# EAGLE board ISCTrainingProgramw2016_1 (EAGLE 7.5.0)
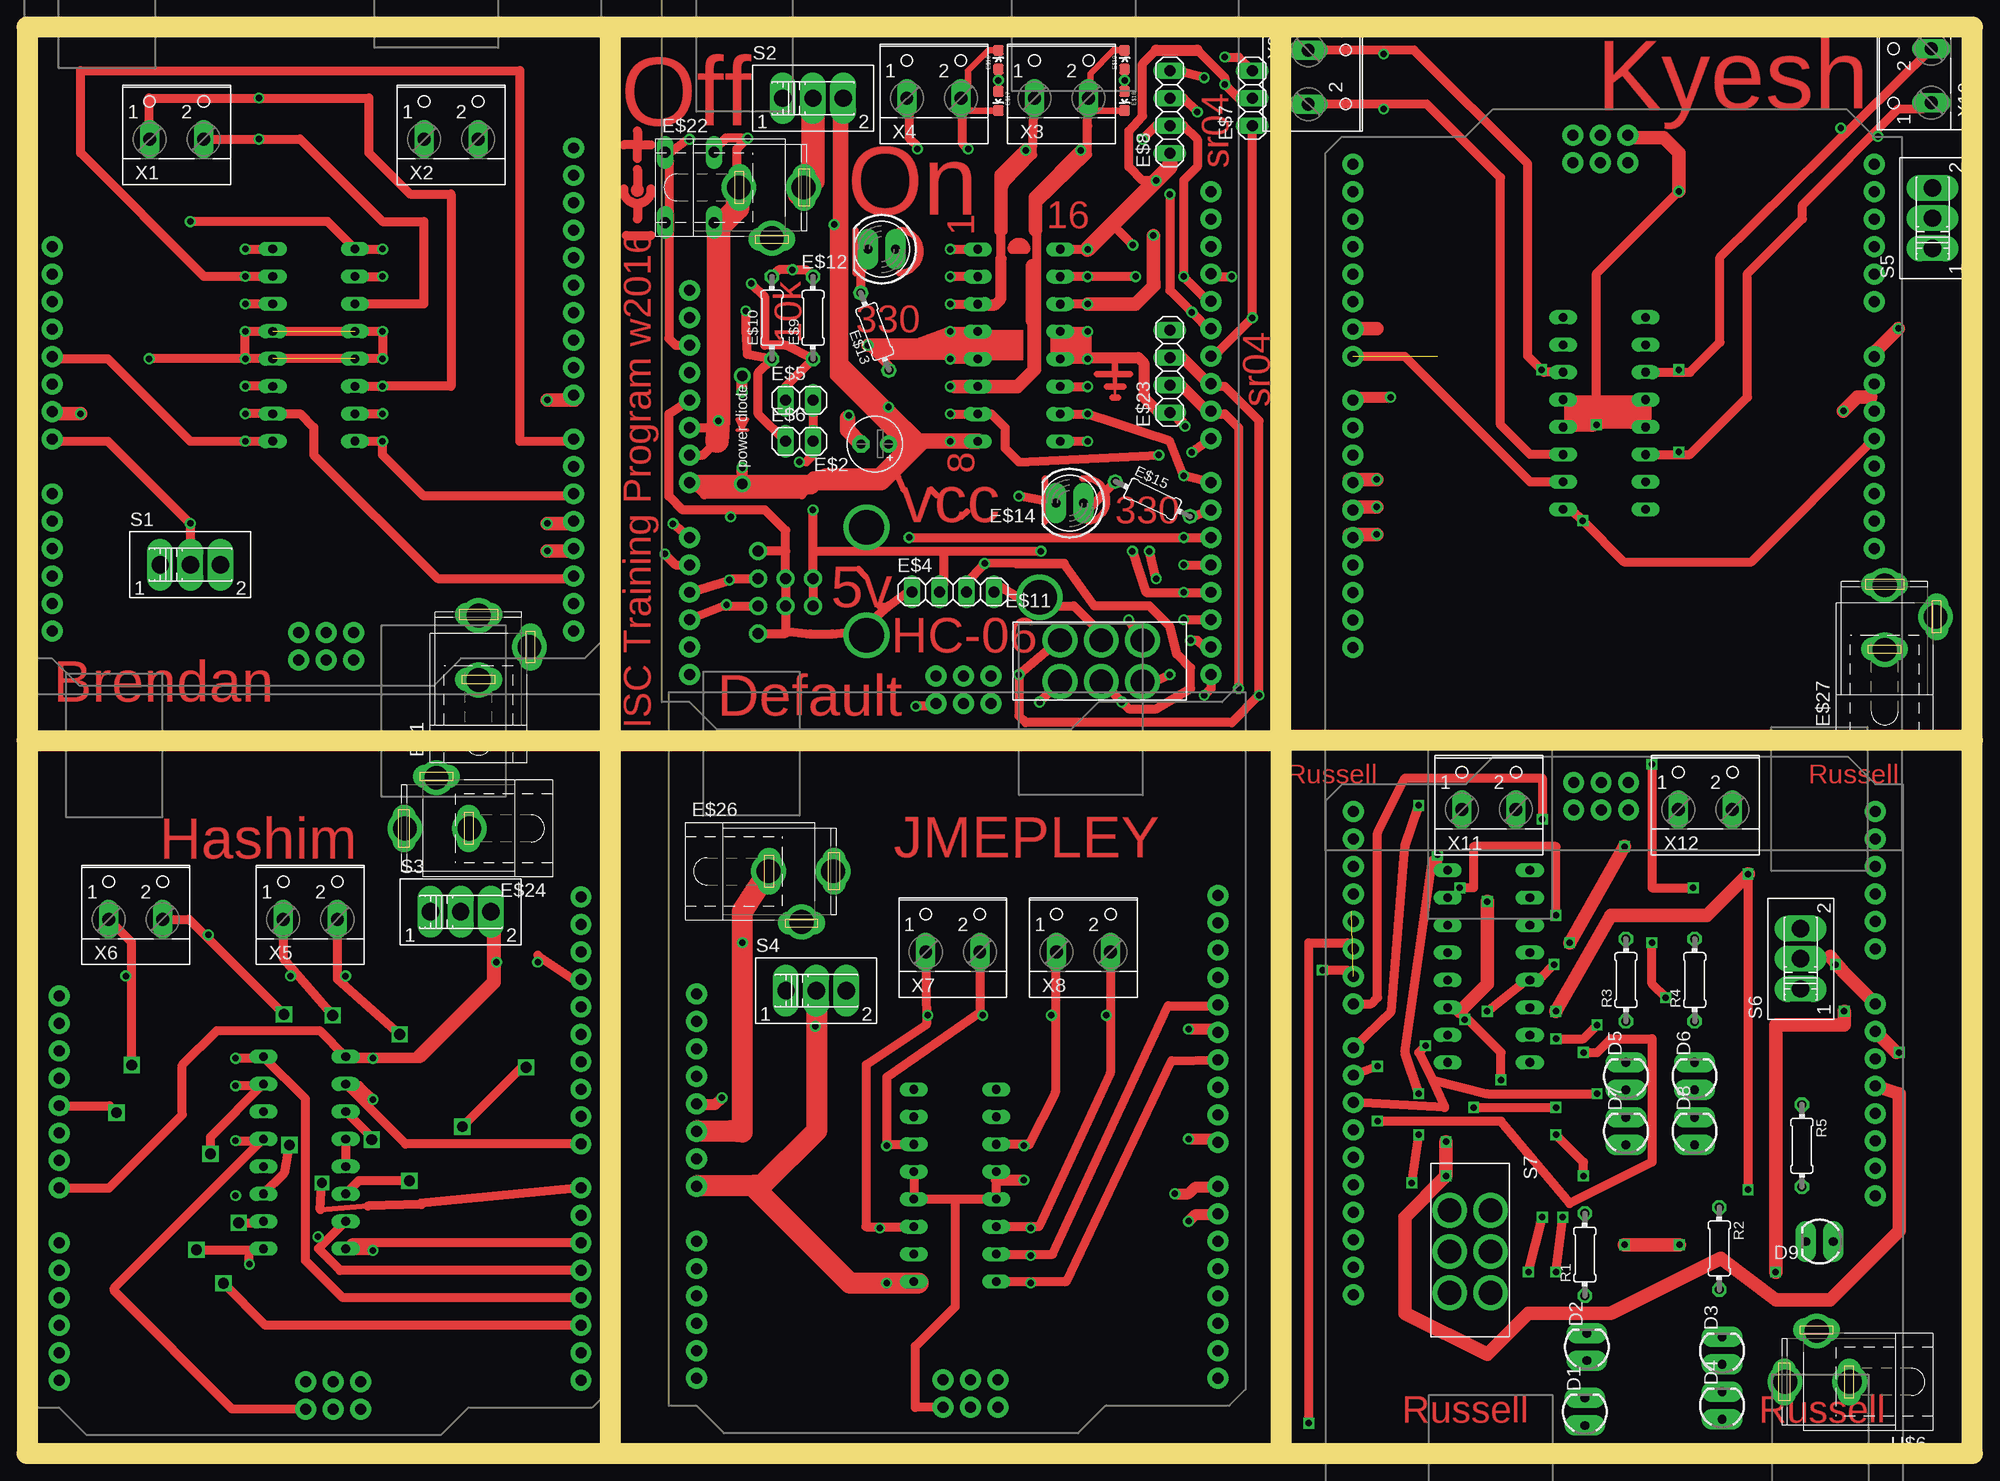
[diagram p0: board, top side]
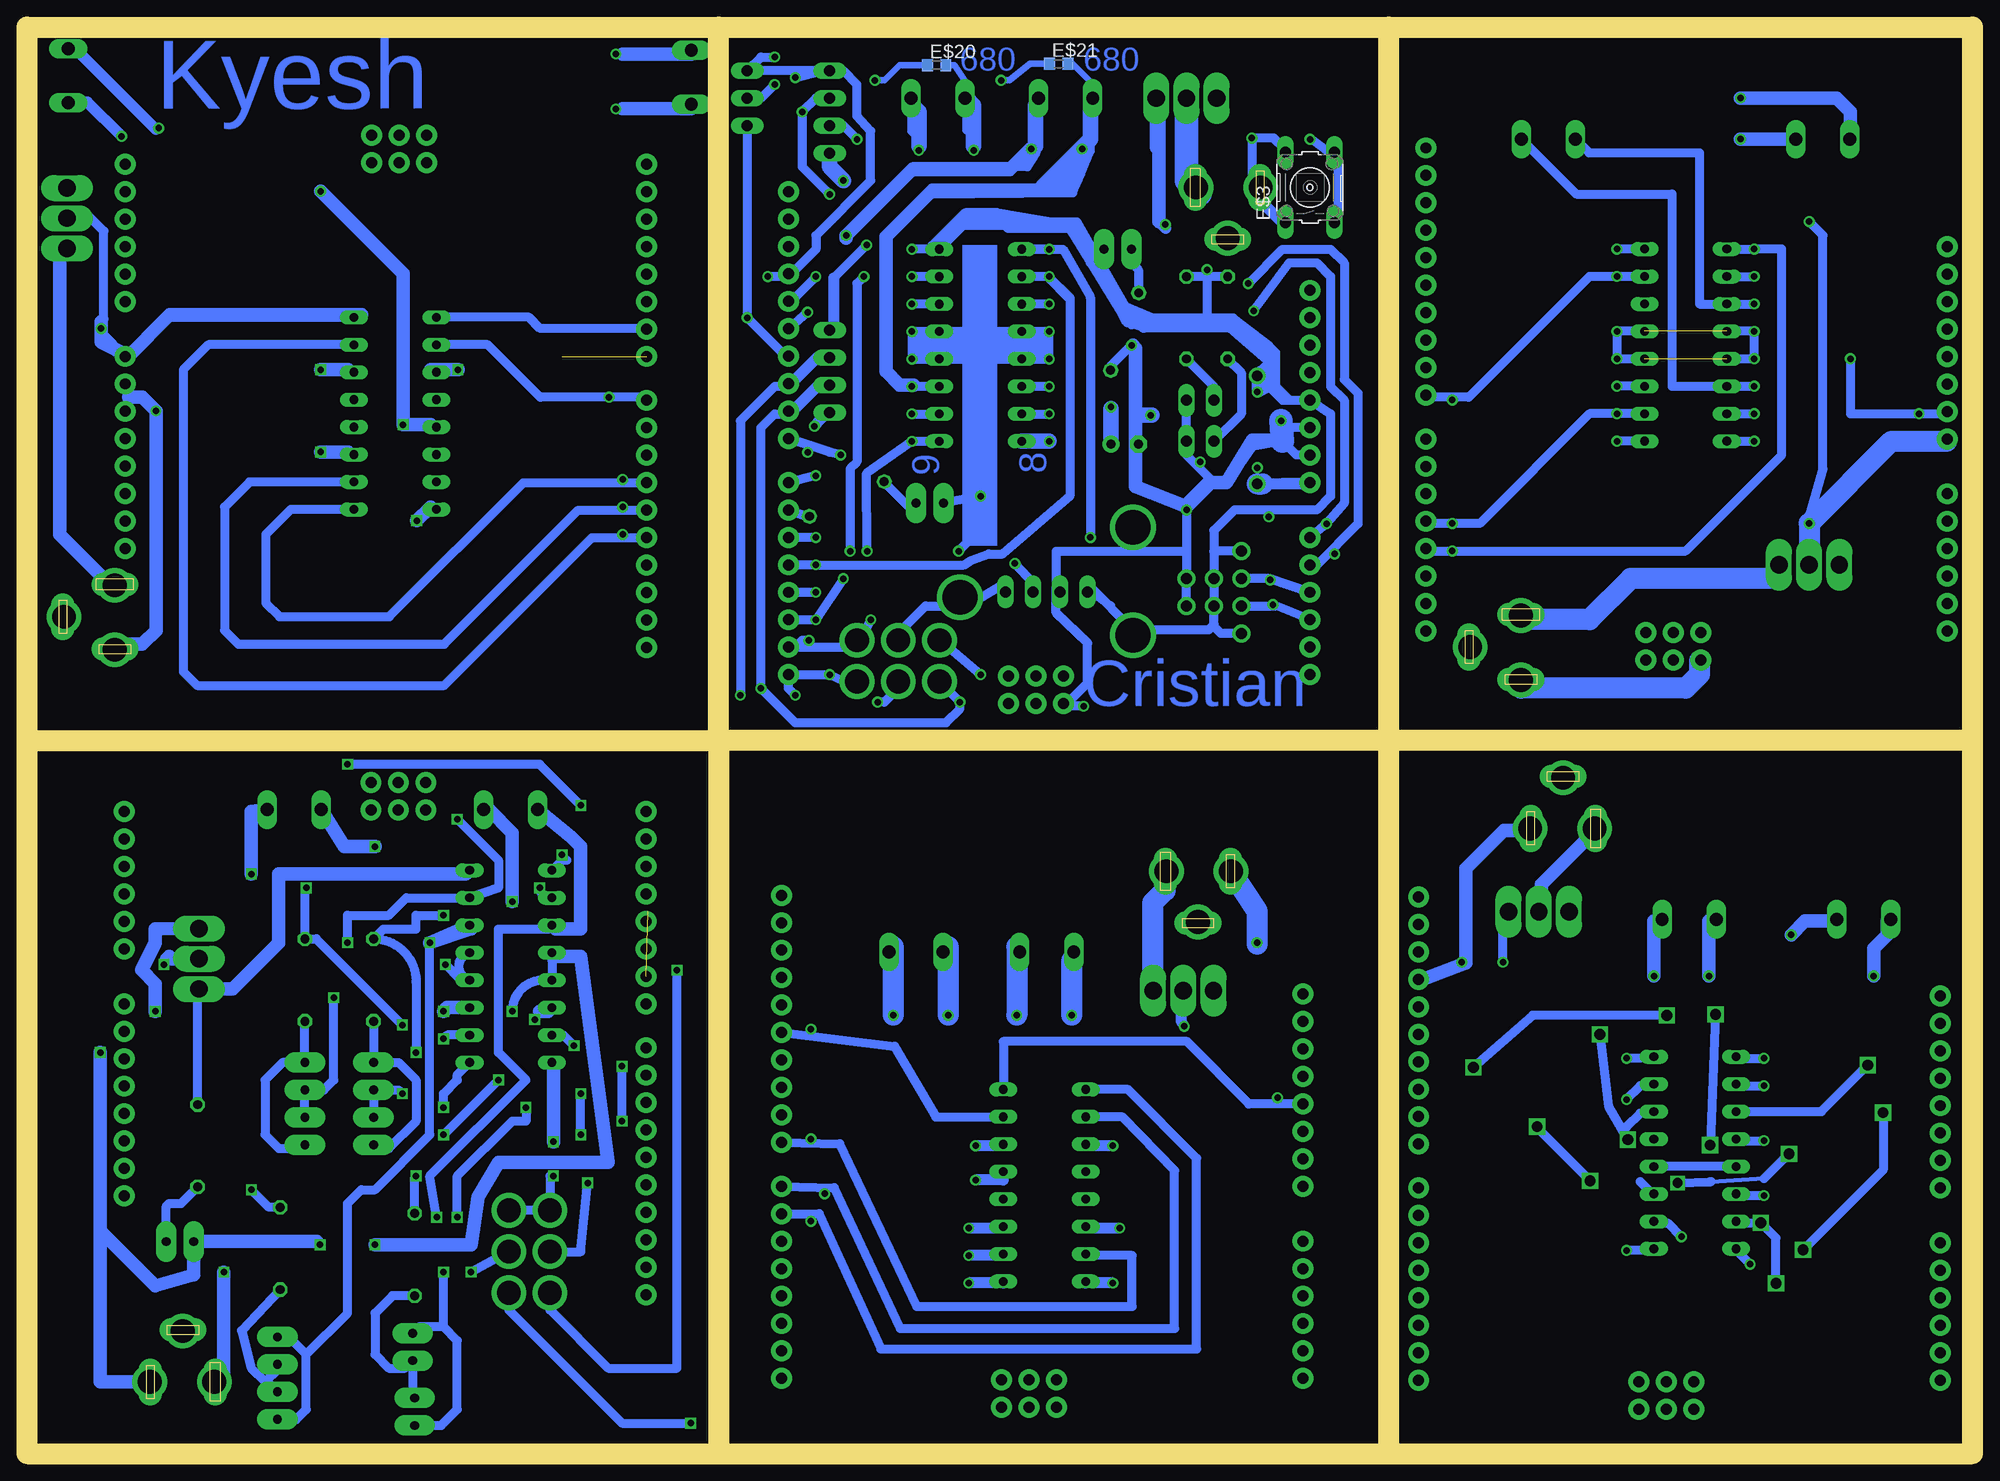
[diagram p1: board, bottom side, seen from below]

Size 180 x 132 mm. Coordinates in mm from the lower left corner, seen from the top.
Outline: 0,66 116,66
Outline: 180,66 116,66
Outline: 116,66 116,132
Outline: 116,66 116,0
Outline: 54,0 54,132
Outline: 0,66 0,132 54,132
Outline: 0,66 0,0 54,0
Outline: 180,66 180,0 116,0
Outline: 180,66 180,132 116,132
Outline: 116,132 54,132
Outline: 116,0 54,0
Copper layers (1*16): Top 0.035mm / dielectric 1.5mm / Bottom 0.035mm
Design rules "default": minimum track width 10mil, minimum drill 0.6mm, track to track 8mil, track to pad 8mil, pad to pad 8mil, via to via 8mil, smd to smd 8mil, copper to edge 40mil, drill to drill 8mil, minimum pad ring 10mil, minimum via ring 8mil, stop-mask expansion 4mil, vias tented up to drill 0mil, thermal gap 10mil

## Footprints (pad centres in the part's own frame; a part is rotated, then mirrored left to right if it is on the bottom)
LED3MM = drill 0.813 pad 1.88 long: A -1.27,0; K 1.27,0
5.5-2.5-BARRELCONNECTOR = drill 0.8 pad 2.184 long: 1 -3,0; 2 0,-4.8 | drill 1 pad 2.184 long: 3 3,0 | drill 2.2: P$1 -3.048,0; P$2 2.921,0; P$3 0,-4.699
E2,5-5 = drill 0.813 pad 1.6: + -1.27,0 | drill 0.813 pad 1.6 octagon: - 1.27,0
BUTTON = drill 1.016 long: 1 -3.251,2.261; 2 3.251,2.261; 3 -3.251,-2.261; 4 3.251,-2.261
1X04 = drill 1.016 long: 1 -3.81,0; 2 -1.27,0; 3 1.27,0; 4 3.81,0
1X02 = drill 1.016 long: 1 -1.27,0; 2 1.27,0
1X03 = drill 1.016 long: 1 -2.54,0; 2 0,0; 3 2.54,0
0204/7 = drill 0.813 octagon: 1 -3.81,0; 2 3.81,0
DUAL_SLIDE_SWITCH = drill 2.2: 1 -3.81,-1.905; 2 0,-1.905; 3 3.81,-1.905; 4 -3.81,1.905; 5 0,1.905; 6 3.81,1.905
LED5MM = drill 0.813 pad 1.88 long: A -1.27,0; K 1.27,0
LED-0603 = smd 1 x 1: A 0,-0.877; C 0,0.877
R0603 = smd 1 x 1.1: 1 -0.85,0; 2 0.85,0
ARDUINO_R3 = drill 1.016 pad 1.93: 3.3V 35.56,2.54; 5V 38.1,2.54; A0 50.8,2.54; A1 53.34,2.54; A2 55.88,2.54; A3 58.42,2.54; A4 60.96,2.54; A5 63.5,2.54; AREF 23.876,50.8; D0 63.5,50.8; D1 60.96,50.8; D2 58.42,50.8; D3 55.88,50.8; D4 53.34,50.8; D5 50.8,50.8; D6 48.26,50.8; D7 45.72,50.8; D8 41.656,50.8; D9 39.116,50.8; D10 36.576,50.8; D11 34.036,50.8; D12 31.496,50.8; D13 28.956,50.8; GND@1 40.64,2.54; GND@2 43.18,2.54; GND@3 26.416,50.8; GND@4 66.18,25.35; IOREF 30.48,2.54; MISO 63.64,30.43; MOSI 66.18,27.89; NC 27.94,2.54; RESET@1 33.02,2.54; RESET@2 63.64,25.35; SCK 63.64,27.89; SCL 18.796,50.8; SDA 21.336,50.8; VCC 66.18,30.43; VIN 45.72,2.54
DIP16 = drill 0.8 long: P1 -8.89,-3.81; P2 -6.35,-3.81; P3 -3.81,-3.81; P4 -1.27,-3.81; P5 1.27,-3.81; P6 3.81,-3.81; P7 6.35,-3.81; P8 8.89,-3.81; P9 8.89,3.81; P10 6.35,3.81; P11 3.81,3.81; P12 1.27,3.81; P13 -1.27,3.81; P14 -3.81,3.81; P15 -6.35,3.81; P16 -8.89,3.81
SLIDE_SWITCH = drill 1.6 long: 1 -2.794,0; 2 0,0; 3 2.794,0
2PIN-SCREW-TERMINAL = drill 1.194 long: 1 -2.5,-1.27; 2 2.5,-1.27

## Placement (x,y rotation side)
D1  [LED3MM]  144.13,3.87 90 top
D2  [LED3MM]  144.32,9.87 90 top
D3  [LED3MM]  156.83,9.52 90 top
D4  [LED3MM]  156.83,4.44 90 top
D5  [LED3MM]  147.94,34.92 90 top
D6  [LED3MM]  154.29,34.92 90 top
D7  [LED3MM]  147.94,29.84 90 top
D8  [LED3MM]  154.29,29.84 90 top
D9  [LED3MM]  165.85,19.62 180 top
E$1  [5.5-2.5-BARRELCONNECTOR]  41.78,74.63 90 top
E$2  [E2,5-5]  78.44,93.41 180 top
E$3  [BUTTON]  61.3,117.16 90 bottom
E$4  [1X04]  85.67,79.72 0 top
E$5  [1X02]  71.45,97.47 0 top
E$6  [1X02]  71.45,93.66 0 top
E$7  [1X03]  113.37,125.41 90 top
E$8  [1X04]  105.75,124.14 90 top
E$9  [0204/7]  72.72,105.09 90 top
E$10  [0204/7]  68.92,105.09 90 top
E$11  [DUAL_SLIDE_SWITCH]  99.39,73.34 0 top
E$12  [LED5MM]  79.08,111.44 180 top
E$13  [0204/7]  78.44,103.82 110 top
E$14  [LED5MM]  96.47,87.95 180 top
E$15  [0204/7]  104.15,88.33 335 top
E$16  [LED-0603]  89.87,128.97 0 top
E$17  [LED-0603]  89.87,125.16 180 top
E$18  [LED-0603]  101.55,125.16 180 top
E$19  [LED-0603]  101.55,128.97 0 top
E$20  [R0603]  95.84,128.46 0 bottom
E$21  [R0603]  84.54,128.59 0 bottom
E$22  [5.5-2.5-BARRELCONNECTOR]  68.92,117.16 0 top
E$23  [1X04]  105.75,100.14 90 top
E$24  [5.5-2.5-BARRELCONNECTOR]  37.88,57.84 180 top
E$25  [ARDUINO_R3]  -0.22,139.61 270 top
E$26  [5.5-2.5-BARRELCONNECTOR]  71.66,53.88 0 top
E$27  [5.5-2.5-BARRELCONNECTOR]  171.88,77.43 90 top
ENABLE  MOTOR_DRIVERDIP16  [DIP16]  145.94,96.25 90 top
J1  ARDUINO_UNO_R3  [ARDUINO_R3]  58.75,135.57 270 top
J2  ARDUINO_UNO_R3  [ARDUINO_R3]  0.45,70.3 270 top
J3  ARDUINO_UNO_R3  [ARDUINO_R3]  59.41,70.46 270 top
J4  ARDUINO_UNO_R3  [ARDUINO_R3]  173.46,55.8 90 top
J5  ARDUINO_UNO_R3  [ARDUINO_R3]  173.53,-4.1 90 top
R1  [0204/7]  144.13,18.41 90 top
R2  [0204/7]  156.57,18.98 270 top
R3  [0204/7]  147.94,43.81 90 top
R4  [0204/7]  154.29,43.81 90 top
R5  [0204/7]  164.22,28.48 270 top
S1  [SLIDE_SWITCH]  15.11,82.25 0 top
S2  [SLIDE_SWITCH]  72.72,125.41 0 top
S3  [SLIDE_SWITCH]  40.12,50.13 0 top
S4  [SLIDE_SWITCH]  73.01,42.83 0 top
S5  [SLIDE_SWITCH]  176.31,114.31 90 top
S6  [SLIDE_SWITCH]  164.1,45.78 90 top
S7  [DUAL_SLIDE_SWITCH]  133.52,18.69 270 top
U$1  MOTOR_DRIVERDIP16  [DIP16]  26.54,102.57 90 top
U$2  MOTOR_DRIVERDIP16  [DIP16]  91.78,102.55 270 top
U$3  MOTOR_DRIVERDIP16  [DIP16]  25.67,27.84 90 top
U$4  MOTOR_DRIVERDIP16  [DIP16]  85.86,24.81 270 top
U$5  MOTOR_DRIVERDIP16  [DIP16]  135.24,45.08 90 top
U$6  BARREL_CONNECTOR  [5.5-2.5-BARRELCONNECTOR]  165.59,6.63 180 top
X1  [2PIN-SCREW-TERMINAL]  13.84,122.89 0 top
X2  [2PIN-SCREW-TERMINAL]  39.24,122.89 0 top
X3  [2PIN-SCREW-TERMINAL]  95.71,126.68 0 top
X4  [2PIN-SCREW-TERMINAL]  83.9,126.68 0 top
X5  [2PIN-SCREW-TERMINAL]  26.22,50.7 0 top
X6  [2PIN-SCREW-TERMINAL]  10.05,50.7 0 top
X7  [2PIN-SCREW-TERMINAL]  85.65,47.69 0 top
X8  [2PIN-SCREW-TERMINAL]  97.75,47.69 0 top
X9  [2PIN-SCREW-TERMINAL]  119.81,127.37 270 top
X10  [2PIN-SCREW-TERMINAL]  174.92,127.49 90 top
X11  [2PIN-SCREW-TERMINAL]  135.26,60.85 0 top
X12  [2PIN-SCREW-TERMINAL]  155.29,60.85 0 top

## Library data of the parts
D1-D9 = ISCTrainingProgram; PROD_ID: DIO-08794
E$1-E$27 ENABLE J1-J5 R1-R5 S1-S7 U$1-U$6 = ISCTrainingProgram
X1-X12 = ISCTrainingProgram; MPN: 237-102; OC_FARNELL: unknown; OC_NEWARK: 70K9898

## Nets
1A: J3.D7 U$4.P2
2A2: J3.D8 U$4.P7
3A2: J3.D13 U$4.P10
4A2: J3.D12 U$4.P15
EN5: J3.D11 U$4.P9
EN6: J3.D6 U$4.P1
ENABLE: ENABLE.P1 J4.D11
GND: U$3.P4 U$3.P5 U$3.P13
GND1: J3.GND@4 U$4.P4 U$4.P5 U$4.P12 U$4.P13
GND4: ENABLE.P4 ENABLE.P5 ENABLE.P12
N$1: U$1.P3 X1.1
N$2: U$1.P6 X1.2
N$3: U$1.P11 X2.1
N$4: U$1.P14 X2.2
N$5: U$1.P16
N$6: U$1.P4 U$1.P5 U$1.P12 U$1.P13
N$7: S1.2
N$8: U$1.P8
N$9: U$1.P15
N$10: U$1.P9
N$11: U$1.P2
N$12: U$1.P1
N$13: U$1.P10
N$14: U$1.P7
N$15: U$2.P6 X3.2
N$16: U$2.P14 X4.2
N$17: U$2.P11 X4.1
N$18: E$8.1 E$9.2 E$10.2 J1.5V U$2.P16
N$19: E$5.2 J1.GND@2
N$20: J1.VIN S2.3 U$2.P8
N$21: J1.D2 U$2.P15
N$22: J1.D3 U$2.P9
N$23: J1.D7 U$2.P10
N$24: J1.D5 U$2.P1
N$25: J1.D4
N$26: U$2.P3 X3.1
N$27: J1.D8 U$2.P7
N$28: U$3.P3 X5.1
N$29: U$3.P6 X5.2
N$30: U$3.P11 X6.1
N$31: U$3.P14 X6.2
N$32: J2.5V U$3.P16
N$33: J2.GND@4 U$3.P12
N$34: J2.VIN S3.3 U$3.P8
N$35: J2.D2 U$3.P15
N$36: J2.D3 U$3.P9
N$37: J2.D8 U$3.P7
N$38: J2.D7 U$3.P10
N$39: J2.D4 U$3.P2
N$40: J2.D5 U$3.P1
N$41: U$4.P6 X7.1
N$55: U$4.P3 X7.2
N$56: U$4.P14 X8.1
N$57: U$4.P11 X8.2
N$63: J3.5V U$4.P16
N$67: J3.VIN U$4.P8
N$68: ENABLE.P3 X10.1
N$69: ENABLE.P13 J4.GND@4
N$70: ENABLE.P16 J4.5V
N$71: ENABLE.P8 J4.VIN
N$72: ENABLE.P6 X10.2
N$73: ENABLE.P11 X9.1
N$74: ENABLE.P14 X9.2
N$75: ENABLE.P2 J4.D12
N$76: ENABLE.P7 J4.D13
N$77: ENABLE.P9 J4.D6
N$78: ENABLE.P15 J4.D7
N$79: ENABLE.P10 J4.D8
N$83: R2.1 U$5.P3 X12.2
N$84: R1.2 X11.2
N$85: J5.VIN
N$86: R5.1 S6.1 U$5.P8
N$87: J5.D8 R4.2 U$5.P2
N$88: J5.D9 R3.2 U$5.P10
N$89: S7.2
N$90: S7.5 U$5.P1
N$91: J5.D5 S7.6
N$92: J5.D6 S7.3
N$93: D3.K D4.A U$5.P6 X12.1
N$94: D3.A D4.K R2.2
N$95: D1.A D2.K U$5.P11 X11.1
N$96: D1.K D2.A R1.1
N$97: D5.K D7.A R3.1
N$98: J5.5V S7.1 S7.4 U$5.P16
N$99: D5.A D7.K J5.D10 U$5.P15
N$100: D6.K D8.A R4.1
N$101: D6.A D8.K J5.D7 U$5.P7
N$102: D9.A R5.2
N$119: D9.K J5.GND@2 U$5.P12 U$5.P13 U$6.1
N$120: S6.3 U$6.3
S$26: S2.2
S$28: E$7.3 E$8.4
S$29: E$8.3
S$32: E$7.1
S$33: E$9.1 J1.A1
S$34: E$6.1 E$10.1 J1.A0
S$36: J1.A2
S$38: J1.D0
S$41: J1.D1
S$65: E$14.K
S$66: U$2.P4 U$2.P5 U$2.P12 U$2.P13
S$67: E$15.1
S$68: U$2.P2
S$69: E$15.2 J1.D6
S$70: J1.GND@1
S$93: J1.A3
S$100: J1.RESET@1
S$111: E$2.+
S$130: J1.D10
S$154: S4.3
S$155: E$26.P$1
S$176: S5.2
S$191: U$5.P14
S$194: U$5.P9
S$195: S6.2
S$197: U$5.P4 U$5.P5

## Tracks (layer width: path | path; a pad name or v marks a point on that pad's centre or on a via)
1A
  Bottom 0.813: J3.D7 105.32,24.61 99.22,11.59 73.82,11.59 73.82,26.2 78.63,31.15 U$4.P2
2A2
  Bottom 0.813: J3.D8 104.81,28.67 97.7,13.62 77.76,13.62 77.76,18.32 82.06,18.32 U$4.P7
3A2
  Top 0.813: U$4.P10 94.9,18.46 105.57,41.44 110.21,41.44 J3.D13
4A2
  Bottom 0.813: J3.D12 99.73,37.69 95.92,31.15 89.67,31.15 U$4.P15
EN5
  Top 0.813: U$4.P9 96.05,15.92 96.17,15.91 105.89,36.35 J3.D11
EN6
  Bottom 0.813: J3.D6 106.71,22.2 101,9.68 71.79,9.68 71.79,27.34 78.12,33.69 U$4.P1
ENABLE
  Bottom 0.813: ENABLE.P1 155.6,87.36 157.91,85.05 157.91,78.7 156.64,77.43 146.48,77.43 134.07,89.84 J4.D11
GND
  Top 0.813: U$3.P5 U$3.P4
  Bottom 0.813: U$3.P13 U$3.P4
GND1
  Top 0.813: U$4.P4 U$4.P5 85.89,23.54 | U$4.P13 U$4.P12 85.89,23.54 | J3.GND@4 82.2,4.28 82.2,9.94 85.89,13.62 85.89,23.54
GND4
  Top 0.813: ENABLE.P12 ENABLE.P5 ENABLE.P4
N$1  (via drill 0.6)
  Top 0.813: U$1.P3 v32.89,98.76 39.24,98.76 39.24,116.54 35.43,116.54 31.62,120.35 31.62,125.43 v21.46,125.43 11.3,125.43 11.3,121.66 X1.1
  Bottom 0.813: U$1.P3 v32.89,98.76
  Bottom 1.27: 11.3,121.62 11.3,124.16 12.57,125.43 v21.46,125.43
N$2  (via drill 0.6)
  Top 0.813: X1.2 v21.46,121.62 25.27,121.62 32.89,114 36.7,114 36.7,106.38 U$1.P6
  Bottom 1.27: 16.38,121.62 v21.46,121.62
N$3  (via drill 0.6)
  Top 0.813: U$1.P11 v20.19,106.38
  Bottom 0.813: v20.19,106.38 U$1.P11 25.27,106.38 25.27,120.35 35.47,120.35 X2.1
N$4  (via drill 0.6)
  Top 0.813: U$1.P14 v20.19,98.76
  Bottom 0.813: v20.19,98.76 U$1.P14 27.81,98.76 27.81,116.54 36.66,116.54 X2.2
N$5  (via drill 0.6)
  Top 0.813: 2.41,101.3 7.49,101.3 15.11,93.68 v20.19,93.68 U$1.P16
  Bottom 0.813: U$1.P16 v20.19,93.68
N$6  (via drill 0.6)  (2 unrouted)
  Top 0.813: v20.19,101.3 U$1.P13 U$1.P4 v32.89,101.3 v32.89,103.84 U$1.P12 v20.19,103.84 v20.19,101.3 | v20.19,101.3 v11.3,101.3
  Top 1.27: 2.41,96.22 v4.95,96.22
  Bottom 0.813: U$1.P13 v20.19,101.3 v20.19,103.84 U$1.P12 | U$1.P5 v32.89,103.84 v32.89,101.3 U$1.P4 | v11.3,101.3 11.3,96.22 v4.95,96.22 2.41,96.22
N$7  (via drill 0.6)
  Top 0.813: 2.41,93.68 7.49,93.68 v15.11,86.06 S1.2
  Bottom 1.93: S1.2 v15.11,86.06 7.49,93.68 2.41,93.68
N$8  (via drill 0.6)
  Top 0.813: v32.89,111.46 U$1.P8 27.81,114 v15.11,114
  Bottom 0.813: U$1.P8 v32.89,111.46 | 15.36,85.81 13.84,91.14 13.84,112.73 v15.11,114
N$9  (via drill 0.6)
  Top 0.813: 50.67,80.98 37.97,80.98 26.54,92.41 26.54,94.95 25.27,96.22 U$1.P15 v20.19,96.22
  Bottom 0.813: U$1.P15 v20.19,96.22
N$10  (via drill 0.6)
  Top 0.813: v20.19,111.46 U$1.P9
  Top 1.27: v48.13,83.52 50.67,83.52
  Bottom 0.813: U$1.P9 v20.19,111.46 17.65,111.46 17.65,92.41 26.54,83.52 v48.13,83.52 50.67,83.52
N$11  (via drill 0.6)
  Top 0.813: U$1.P2 v32.89,96.22
  Top 1.27: v48.13,86.06 50.67,86.06
  Bottom 0.813: v32.89,96.22 U$1.P2 35.43,96.22 45.59,86.06 v48.13,86.06 50.67,86.06
N$12  (via drill 0.6)
  Top 0.813: U$1.P1 v32.89,93.68 32.89,92.41 36.7,88.6 50.67,88.6
  Bottom 0.813: U$1.P1 v32.89,93.68
N$13  (via drill 0.6)
  Top 0.813: v20.19,108.92 U$1.P10 16.38,108.92 4.95,120.35 4.95,127.97 45.59,127.97 45.59,93.68 50.67,93.68
  Bottom 0.813: U$1.P10 v20.19,108.92
N$14  (via drill 0.6)
  Top 0.813: U$1.P7 v32.89,108.92
  Bottom 0.813: v32.89,108.92 U$1.P7 35.43,108.92 46.61,97.74 50.67,97.74
N$15  (via drill 0.6)
  Top 0.813: 88.6,98.74 88.47,98.74 U$2.P6 85.81,98.74 v85.42,98.74 | 91.65,98.74 91.78,98.74 93.43,100.27 93.43,115.63 98.12,120.21 98.12,122.83 X3.2
  Top 1.27: 93.17,104.58 93.17,100.27 91.65,98.74 88.6,98.74 | 88.47,98.74 85.81,98.74
  Bottom 0.813: v85.42,98.74 U$2.P6
N$16  (via drill 0.6)
  Top 0.813: v104.22,112.71 104.47,108.01 102.82,106.36 v98.12,106.36 U$2.P14
  Top 1.27: v98.12,106.36 102.57,106.36 104.22,108.01 v104.22,112.71
  Bottom 0.813: U$2.P14 v98.12,106.36 | X4.2 86.66,120.37 87.46,119.06 98.12,119.06 v104.22,112.71
N$17  (via drill 0.6)
  Top 0.813: U$2.P11 v98.12,98.74
  Bottom 0.813: U$2.P11 99.39,98.74 100.67,100.01 100.67,112.71 96.86,116.52 83.27,116.65 82.5,118.43 81.61,120.55 X4.1
N$18  (via drill 0.6, 1 pad 1.68)
  Top 0.813: U$2.P16 v98.12,111.44 | v104.47,117.79 103.2,117.79 101.94,119.06 101.94,122.37 103.2,123.76 103.2,128.59 104.47,129.86 | 108.28,129.86 110.82,127.32 v110.82,126.68 112.09,125.41 | J1.5V 59.39,96.2 59.39,88.58 60.66,87.31 68.28,87.31 70.19,85.41 70.19,83.5 | E$9.2 72.09,109.54 v70.82,109.54 69.55,109.54 E$10.2 | 70.19,83.5 v70.19,80.96 v70.19,78.42 70.19,76.11 | 70.19,76.11 70.19,75.88 v67.64,75.88 | 70.19,76.11 72.45,75.84 74.5,75.84 77.03,76.11 79.71,78.42 82.25,80.33 | 70.19,83.5 v67.64,83.5
  Top 1.016: 104.47,129.86 108.28,129.86
  Top 1.422: v98.12,111.44 v104.47,117.79 105.75,119.06 E$8.1
  Bottom 0.61: 67.01,103.44 67.52,103.44 68.28,104.2 68.79,104.2 69.04,104.46
  Bottom 0.813: 96.22,111.44 U$2.P16 93.05,113.98 82.89,113.98 77.81,105.09 70.82,105.09 | 96.22,111.44 v98.12,111.44 | 63.2,97.47 63.83,97.47 65.11,98.74 65.11,102.55 68.41,105.09 70.82,105.09 | 63.2,97.47 J1.5V 59.39,96.2 59.39,88.58 60.66,87.31 68.28,87.31 70.19,85.41 70.19,83.5 | v110.82,126.68 112.09,125.41 | v70.82,109.54 70.82,105.09 | E$10.2 E$9.2 | 70.19,83.5 v70.19,80.96 v70.19,78.42 70.19,76.52 69.55,75.88 v67.64,75.88 | 63.2,97.47 64.47,98.74 64.47,101.28 67.77,104.08 69.04,104.46 77.81,104.46 | 77.81,104.46 78.44,105.09 | 78.44,105.09 78.44,105.73 79.08,106.36 79.08,107 79.71,107.63 79.71,108.27 81.61,110.17 81.61,111.44 82.89,112.71 82.89,113.35 83.52,113.35 | 83.52,113.35 89.23,113.35 90.5,114.62 93.05,114.62 96.22,111.44 | 77.81,104.46 83.52,113.35 | 83.52,113.35 78.44,105.09 | v67.64,83.5 70.19,83.5
  Bottom 1.422: v104.47,117.79 105.75,119.06 E$8.1
N$19  (via drill 0.6, 1 pad 1.68)
  Top 0.813: 72.72,83.5 v72.72,80.96 v72.72,78.42 | 72.72,83.5 v72.72,87.31 | E$5.2 72.72,92.39 72.09,91.76 | 72.72,83.5 84.79,83.5 | 84.79,83.5 84.79,80.33 | J1.GND@2 62.56,92.39 63.83,93.66 | 84.79,83.5 v93.81,83.5
  Top 2.184: 65.74,116.52 65.74,115.25 63.97,113.48 v63.97,95.57 63.83,93.66
  Bottom 0.813: 70.19,89.85 69.04,89.85 68.92,89.85 66.61,93.16 63.83,93.66 62.56,92.39 J1.GND@2 | 70.19,89.85 72.72,92.39 E$5.2 | 70.19,89.85 v72.72,87.31 72.72,83.5 | 72.72,83.5 v72.72,80.96 v72.72,78.42 | 84.79,80.33 84.79,83.5 72.72,83.5 | v93.81,83.5 92.92,84.39
  Bottom 1.27: 63.96,93.79 66.61,93.79 69.04,89.85 70.69,89.85 72.85,87.69 77.42,89.47 77.42,102.3 77.68,102.55
  Bottom 2.184: 63.83,93.66 v63.97,95.57
N$20  (via drill 0.6)
  Top 0.813: 75.27,125.41 75.27,124.14 75.27,101.28 75.52,101.03 | U$2.P8 v85.42,93.66 82.89,93.66 v79.71,96.84 75.52,101.03 | S2.3 75.52,101.03 | v74.67,113.72 74.67,99.72 81.67,92.72 80.67,92.72 | 80.67,92.72 78.67,90.72 73.67,90.72 71.67,88.72 62.67,88.72 61.67,89.72 62.69,89.72 63.2,89.22 72.72,89.22 73.36,89.85 | 72.09,89.85 72.72,90.49 74,90.49 | 80.67,92.72 80.67,94.72
  Top 1.422: 75.27,124.14 75.27,100.01 81.61,93.66 U$2.P8 82.89,93.66 79.08,89.85 73.36,89.85 72.09,89.85 J1.VIN
  Bottom 0.813: J1.VIN 63.83,89.85
  Bottom 1.422: v85.42,93.66 U$2.P8
N$21  (via drill 0.6)
  Top 0.813: v104.47,80.96 v103.84,83.5 | v107.02,77.15 J1.D2 | v102.57,108.9 U$2.P15
  Bottom 0.813: J1.D2 v107.02,77.15 v104.47,80.96 | U$2.P15 v98.12,108.9 | v102.57,108.9 103.2,108.27 103.2,91.76 103.84,91.12 v103.84,83.5
N$22  (via drill 0.6)
  Top 0.813: v102.28,83.5 103.53,79.69 v107.02,79.69 J1.D3 | U$2.P9 v98.12,93.66
  Bottom 0.813: v107.02,79.69 J1.D3 | U$2.P9 v98.12,93.66 102.3,90.7 v102.28,83.5
N$23  (via drill 0.6)
  Top 0.813: U$2.P10 v98.12,96.2 105.75,93.66 v107.02,90.49 J1.D7
  Bottom 0.813: v98.12,96.2 U$2.P10 | v107.02,90.49 J1.D7
N$24  (via drill 0.6)
  Top 0.813: v81.61,84.77 v107.02,84.77 J1.D5 | v85.42,111.44 U$2.P1
  Bottom 0.813: v85.42,111.44 U$2.P1 84.16,111.44 81.61,107 v81.61,84.77 | v107.02,84.77 J1.D5
N$25  (via drill 0.6)
  Top 0.813: v107.02,82.23 J1.D4
  Bottom 0.813: 83.52,107 83.52,88.58 89.74,83.25 91.01,83.25 92.66,82.61 93.3,82.23 v107.02,82.23 J1.D4
N$26  (via drill 0.6)
  Top 0.813: X3.1 93.05,120.17 90.5,117.54 90.12,116.27 90.12,113.22 90.12,110.54 90.12,106.74 89.23,106.36 U$2.P3 v85.42,106.36
  Top 1.016: 88.89,106.29 89.56,106.29 90.11,106.83 90.11,110.53 90.12,110.54
  Top 1.27: 90.12,113.22 90.12,118.3 v92.41,120.59
  Bottom 0.813: v85.42,106.36 U$2.P3 | v92.41,120.59 92.41,120.97 92.41,121.86 93.05,122.49 93.05,125.03
  Bottom 1.422: 92.41,120.97 92.41,124.78 93.05,125.41
N$27  (via drill 0.6)
  Top 0.813: v85.42,96.2 U$2.P7 89.23,96.2 90.5,94.93 90.5,93.03 91.78,91.76 v104.73,92.39
  Bottom 0.813: U$2.P7 v85.42,96.2 | v104.73,92.39 105.75,92.65 J1.D8
N$28  (via drill 1)
  Top 0.813: X5.1 23.72,45.8 v28.27,40.55 | v46.17,35.74 45.78,35.74 v40.27,30.24 | v35.38,25.24 30.7,25.24 U$3.P3
  Bottom 0.813: v28.27,40.55 40.67,40.55 v46.17,35.74 | v40.27,30.24 40.27,30.15 v35.38,25.24
N$29  (via drill 1)
  Top 0.813: X5.2 28.72,43.91 v34.48,38.78 | v31.88,29.05 31.98,29.16 U$3.P6
  Bottom 0.813: v34.48,38.78 33.67,32.15 v31.88,29.05
N$30  (via drill 1)
  Top 0.813: v9.68,35.95 9.68,47.31 X6.1
  Bottom 0.813: U$3.P11 13.98,31.65 v9.68,35.95
N$31  (via drill 1)
  Top 0.813: X6.2 14.98,49.44 v23.77,40.65 | v24.27,28.55 23.77,25.94 U$3.P14
  Bottom 0.813: v23.77,40.65 v24.27,28.55
N$32  (via drill 1)
  Top 0.813: J2.5V 7.62,32.2 v8.27,31.55 | v15.67,18.84 21.77,18.84 U$3.P16
  Bottom 0.813: v8.27,31.55 8.27,26.24 v15.67,18.84
N$33
  Top 0.813: J2.GND@4 19.01,4.12 8.07,15.05 8.07,15.32 U$3.P12
N$34
  Top 0.813: J2.VIN 7.61,24.58 14.38,31.34 14.38,35.95 17.58,39.15 27.06,39.15 U$3.P8 35.95,36.73 42.98,43.74 42.98,49.45 43.48,49.95 43.11,49.95 S3.3
N$35  (via drill 1)
  Top 0.813: J2.D2 22.05,11.88 v18.17,15.75 | v19.58,21.34 21.73,21.34 U$3.P15
  Bottom 0.813: v18.17,15.75 18.17,19.95 v19.58,21.34
N$36
  Top 0.813: J2.D3 29.2,14.41 25.77,17.84 25.77,32.81 U$3.P9
N$37
  Top 0.813: J2.D8 35.03,28.64 U$3.P7
N$38  (via drill 0.9, 1)
  Top 0.5: 31.55,22.91 27.15,22.58
  Top 0.813: J2.D7 36.38,23.15 36.48,23.15 36.48,23.05 31.55,22.91 | 27.15,22.58 v27.27,25.05 | v16.98,27.74 16.98,29.3 U$3.P10
  Bottom 0.406: 24.17,25.15 19.27,25.45
  Bottom 0.813: v27.27,25.05 24.27,25.15 24.17,25.15 | 19.27,25.45 v16.98,27.74
N$39
  Top 0.813: J2.D4 28.97,16.95 26.98,18.95 26.98,18.98 U$3.P2
N$40
  Top 0.813: J2.D5 30.03,19.5 U$3.P1
N$41
  Top 0.813: X7.1 83.22,39.69 77.63,35.97 77.61,20.99 82.06,20.99 U$4.P6
N$55
  Top 0.813: X7.2 88.17,44.77 88.17,40.8 79.53,34.83 79.53,28.61 82.06,28.61 U$4.P3
N$56
  Top 0.813: X8.1 95.16,44.77 95.16,33.43 92.72,28.61 U$4.P14
N$57
  Top 0.813: X8.2 100.24,44.77 100.24,35.21 93.61,20.99 U$4.P11
N$63
  Bottom 0.813: J3.5V 66.96,32.36 72.68,38.13 89.67,38.13 U$4.P16
N$67
  Top 0.813: J3.VIN 66.83,24.74 75.72,15.91 82.06,15.91 U$4.P8
N$68
  Top 0.813: ENABLE.P3 153.87,92.44 159.18,97.75 159.18,109.18 164.26,114.26 164.26,115.53 173.15,124.42 175.37,124.42 X10.1
N$69  (via drill 0.6)
  Top 0.813: ENABLE.P13 144.98,94.98 v145.21,95.21 145.21,109.18 v152.83,116.8 152.83,120.61 151.46,121.98 J4.GND@4
  Top 1.27: v152.83,116.8 152.83,120.36 151.43,121.75 148.13,121.75 148,121.88
  Bottom 1.27: 142.67,95.21 v145.21,95.21 145.21,109.18 v152.83,116.8
N$70  (via drill 0.6)
  Top 0.813: ENABLE.P16 142.9,87.36 v143.94,86.32 147.75,82.51 159.53,82.51 J4.5V
  Bottom 1.27: 142.67,87.59 v143.94,86.32
N$71  (via drill 0.6)
  Top 1.27: 170.61,101.56 v173.15,104.1
  Bottom 0.813: 173.15,102.83 173.15,103.75 J4.VIN 167.3,105.14 ENABLE.P8
  Bottom 1.27: 173.15,104.73 v173.15,104.1 173.15,102.83 170.61,101.56 166.8,105.37 149.02,105.37
N$72
  Top 0.813: ENABLE.P6 153.87,100.06 156.64,102.83 156.64,110.69 X10.2
N$73  (via drill 0.6)
  Top 0.813: ENABLE.P11 140.36,100.06 v140.13,100.29 138.86,101.56 138.86,119.34 128.33,129.87 X9.1
  Bottom 1.27: v140.13,100.29 142.67,100.29
N$74
  Top 0.813: X9.2 129.52,124.87 136.32,118.07 136.32,95.21 139.09,92.44 ENABLE.P14
N$75
  Bottom 0.813: ENABLE.P2 159.41,89.9 161.72,87.59 161.72,76.16 160.45,74.89 141.4,74.89 128.99,87.3 J4.D12
N$76
  Bottom 0.813: ENABLE.P7 163.22,102.6 165.53,100.29 165.53,72.35 164.26,71.08 141.4,71.08 127.72,84.76 J4.D13
N$77
  Bottom 0.813: J4.D6 122.7,104.1 132.51,104.1 133.55,105.14 ENABLE.P9
N$78  (1 unrouted)
  Top 0.813: ENABLE.P15 139.09,89.9 127.47,101.52 J4.D7
N$79  (via drill 0.6)
  Top 1.016: 122.35,97.75 v126.16,97.75
  Bottom 0.813: J4.D8 122.95,97.75 v126.16,97.75 132.51,97.75 137.36,102.6 ENABLE.P10
N$80  (via drill 0.6)
  Bottom 1.27: 150.29,92.67 v152.83,92.67
N$81  (via drill 0.6)
  Bottom 1.27: 150.29,100.29 v152.83,100.29
N$82
  Top 0.813: 149.02,95.21 142.67,95.21 142.67,97.75
N$83  (via drill 0.6)
  Top 0.813: v159.24,24.41 v159.24,53.62
  Top 1.27: v141.46,40.92 146.54,49.81 155.43,49.81 v159.24,53.62
  Bottom 0.813: R2.1 157.62,22.79 v159.24,24.41
  Bottom 1.27: U$5.P3 141.11,41.27 v141.46,40.92 | v159.24,53.62 159.24,59.4 X12.2
N$84  (via drill 0.6)
  Top 0.813: v144,25.68 144,26.95 v141.46,29.49 | v136.38,34.57 136.38,37.11 132.57,40.92
  Top 1.27: v135.11,51.08 135.11,43.46 132.57,40.92
  Bottom 0.813: R1.2 144.13,25.55 v144,25.68 | v141.46,29.49 v136.38,34.57
  Bottom 1.27: X11.2 137.26,59.58 135.11,57.43 v135.11,51.08
N$85
  Top 1.27: 166.86,46 168.13,44.48 J5.VIN
N$86
  Bottom 0.813: R5.1 164.22,42.87 S6.1
  Bottom 1.27: S6.1 160.98,42.99 156.7,47.27 156.7,53.62 139.4,53.62 U$5.P8
N$87  (via drill 0.6)
  Top 0.813: v141.46,38.38 144,38.38 v145.27,39.65 | J5.D8 126.22,40.92 127.49,56.16 v128.76,59.97 | v150.35,63.78 150.35,52.35 v154.16,52.35
  Bottom 0.813: v145.27,39.65 153.24,47.62 R4.2 154.29,52.22 v154.16,52.35 | U$5.P2 141.11,38.73 v141.46,38.38 | v128.76,59.97 132.57,63.78 v150.35,63.78
N$88  (via drill 0.6)
  Top 0.813: v141.46,49.81 141.46,56.16 133.84,56.16 133.84,52.35 v132.57,52.35 | v144,37.11 145.27,37.11 146.54,38.38 150.35,38.38 150.35,26.95 142.73,23.14 136.38,30.76 v124.95,30.76 | v124.95,35.84 J5.D9
  Bottom 0.813: v141.46,49.81 144,49.81 144,48.54 147.02,48.54 R3.2 arc90 144,43.68 v144,37.11 | v132.57,52.35 arc-90 131.65,51.43 U$5.P10 | v124.95,30.76 v124.95,35.84
N$89  (via drill 0.6)
  Top 0.813: v128.12,25.05 v128.76,29.49 | v128.76,33.3 127.49,37.11 130.03,54.89
  Bottom 0.813: S7.2 128.76,18.69 v128.12,25.05 | v128.76,29.49 v128.76,33.3
N$90  (via drill 0.6)
  Top 0.813: v138.92,16.79 v140.19,21.87 | v133.84,32.03 v141.46,32.03
  Bottom 0.813: S7.5 v138.92,16.79 | v140.19,21.87 140.19,25.68 135.11,30.76 133.84,30.76 v133.84,32.03 | v141.46,32.03 141.46,33.3 140.19,34.57 140.19,35.05 U$5.P1
N$91  (via drill 0.6)
  Top 0.813: v118.6,2.82 118.6,47.27 122.16,47.27 J5.D5
  Bottom 0.813: S7.6 135.43,13.3 124.95,2.82 v118.6,2.82
N$92  (via drill 0.6)  (1 unrouted)
  Top 0.813: v119.87,44.73 122.16,44.73 J5.D6
  Bottom 0.813: S7.3 131.62,13.3 126.22,7.9 119.87,7.9 v119.87,44.73
N$93  (via drill 0.6)
  Top 1.27: v142.73,47.27 v147.81,56.16
  Bottom 0.813: 154.16,9.17 155.43,10.44 | 155.43,10.44 156.48,10.44 D3.K 155.78,10.79 155.43,10.44 | D4.A 155.08,3.17 154.16,4.09 154.16,9.17 | 154.16,9.17 150.35,12.98 150.35,23.14 149.08,24.41 147.81,24.41 142.73,29.49 v142.73,47.27
  Bottom 1.27: 138.92,48.54 v142.73,47.27 U$5.P6 | v147.81,56.16 150.64,56.16 X12.1
N$94
  Bottom 0.813: R2.2 160.16,11.36 159.24,7.9 157.97,6.63 | 157.97,6.63 157.75,6.63 D4.K | D3.A 156.83,7.77 157.97,6.63
N$95  (via drill 0.6)
  Top 0.813: v141.46,16.79 v142.09,21.87
  Bottom 0.813: D1.A 141.68,2.6 140.19,4.09 140.19,10.44 141.46,11.71 | 141.46,11.71 143.75,11.71 D2.K | 141.46,11.71 v141.46,16.79 | v142.09,21.87 142.73,25.68 133.84,34.57 136.38,37.11 136.38,48.54 131.78,48.54 U$5.P11 131.08,48.54
  Bottom 1.27: X11.1 129.64,57.04 128.76,56.16 128.76,48.54 131.08,48.54
N$96
  Bottom 0.813: R1.1 146.19,14.6 147.81,12.98 147.81,9.17 146.54,7.9 145.02,7.9 D2.A 144.32,5.33 D1.K
N$97
  Bottom 0.813: R3.1 D5.K 145.62,36.19 144,34.57 144,30.76 146.54,28.22 147.59,28.22 D7.A
N$98  (via drill 0.6)
  Top 1.27: v131.3,28.85 v131.3,25.68 127.49,21.87 127.49,12.98 135.11,9.17 138.92,12.98 146.54,12.98 156.7,18.06 161.78,14.25 166.86,14.25 173.21,20.6 173.21,33.3 J5.5V
  Bottom 0.813: U$5.P16 131.3,36.19 | v131.3,25.68 131.62,25.68 S7.1 135.11,22.5 135.11,23.14 135.43,23.14 S7.4
  Bottom 1.27: 131.3,36.19 v131.3,28.85
N$99  (via drill 0.6)
  Top 0.813: v129.4,37.74 128.76,37.11 130.03,34.57 | 130.03,34.57 131.17,32.03 J5.D10 | v145.27,33.3 135.11,33.3 130.03,34.57
  Bottom 0.813: U$5.P15 130.38,38.73 v129.4,37.74 | D7.K D5.A 145.62,33.65 v145.27,33.3
N$100
  Bottom 0.813: D8.A 154.64,28.22 156.7,28.22 157.97,29.49 157.97,34.57 156.35,36.19 D6.K R4.1
N$101  (via drill 0.6)
  Top 0.813: v151.62,42.19 150.35,43.46 v150.35,47.27 | J5.D7 124.38,41.62 124.95,42.19 124.95,57.43 127.49,62.51 140.19,62.51 v140.19,58.7
  Bottom 0.813: D8.K D6.A 152.54,33.65 151.62,34.57 v151.62,42.19 | v150.35,47.27 150.35,49.81 146.54,49.81 144.92,51.43 U$5.P7 136.38,52.35 136.38,54.89 v140.19,58.7
N$102
  Bottom 0.813: D9.A 167.12,22.88 166.86,23.14 165.75,23.14 R5.2
N$103  (via drill 0.6)
  other vias: 147.81,19.33
N$104  (via drill 0.6)
  other vias: 159.24,24.41
N$105  (via drill 0.6)
  other vias: 159.24,53.62
N$106  (via drill 0.6)
  other vias: 141.46,40.92
N$108  (via drill 0.6)
  other vias: 145.27,33.3
N$109  (via drill 0.6)
  other vias: 141.46,38.38
N$110  (via drill 0.6)
  other vias: 144,25.68
N$111  (via drill 0.6)
  other vias: 131.3,25.68
N$114  (via drill 0.6)
  other vias: 150.35,47.27
N$115  (via drill 0.6)
  other vias: 132.57,52.35
N$116  (via drill 0.6)
  other vias: 138.92,16.79
N$117  (via drill 0.6)
  other vias: 141.46,32.03
N$118  (via drill 0.6)
  other vias: 173.21,37.11
N$119  (via drill 0.6)
  Top 0.813: v173.21,37.11 172.96,37.11 | v135.11,40.92 138.28,43.46
  Top 1.27: v152.89,19.33 v147.81,19.33 | 172.96,37.11 J5.GND@2
  Bottom 0.813: 153.18,19.62 v152.89,19.33 | 131.08,46 131.43,45.65 U$5.P13 132.22,43.81 arc-90 v135.11,40.92
  Bottom 1.27: 153.18,19.62 D9.K 164.58,16.53 168.13,15.52 173.21,20.6 | 173.21,20.6 v173.21,37.11 | U$5.P12 131.08,46 128.76,46 126.22,26.95 136.38,26.95 138.28,23.77 138.92,19.33 v147.81,19.33 | U$6.1 173.21,6.63 173.21,20.6
N$120  (via drill 0.6)
  Top 1.27: v161.78,16.79 161.78,39.65 168.13,39.65 v168.13,40.92
  Bottom 1.27: U$6.3 161.78,6.63 v161.78,16.79 | v168.13,40.92 168.13,43.46 169.4,44.73 168.13,47.27 168.13,48.54 S6.3
S$14  (via drill 0.6)
  Top 1.27: 50.67,97.49 v48.13,97.49
S$24
  Bottom 1.93: 17.65,80.98 31.62,80.98 35.43,77.17 41.78,77.17
S$25
  Bottom 1.93: 25.27,73.36 25.27,72.09 26.54,70.82 41.78,70.82
S$26
  Top 2.184: 71.45,116.52 72.72,117.79 S2.2
  Bottom 2.184: S2.2 72.72,117.79 71.45,116.52
S$27  (via drill 0.6)
  Top 0.813: 109.56,108.9 v111.46,108.9
  Bottom 0.813: 109.56,108.9 v111.46,108.9
S$28  (via drill 0.6)
  Top 0.813: v108.92,127.32 106.38,127.95 105.11,127.95 | E$7.3 112.09,129.22 v110.82,129.22
  Bottom 0.813: E$8.4 104.47,127.95 103.2,126.68 103.2,123.76 101.94,122.37 101.94,117.79 107.02,112.71 107.02,111.44 109.56,108.9 | v108.92,127.32 106.38,127.95 E$8.4 | E$8.4 E$7.3 112.09,129.22 v110.82,129.22
S$29  (via drill 0.6)
  Top 0.813: 106.38,125.41 107.02,125.41 v108.28,124.14 | v105.75,116.52 105.75,107.63 v107.78,105.6 109.56,103.82
  Bottom 0.813: E$8.3 107.02,125.41 v108.28,124.14 108.28,119.06 v105.75,116.52 | 109.68,103.95 v107.78,105.6
S$30  (via drill 0.6)
  Top 0.813: v103.2,121.6 104.47,122.87 107.02,122.87 108.28,121.6 108.28,119.06 107.02,117.79 v107.02,108.9 109.56,106.36
  Bottom 0.813: v103.2,121.6 104.47,122.87 | v107.02,108.9 109.56,106.36
S$31  (via drill 0.6)
  Top 0.813: v107.78,92.65 109.56,93.92
S$32  (via drill 0.6)
  Top 0.813: 109.56,101.28 v113.37,105.09 E$7.1
  Bottom 0.813: E$7.1 v113.37,105.09 109.56,101.28
S$33  (via drill 0.6)
  Top 0.813: 70.19,98.74 E$9.1 70.19,102.55 68.28,102.55 68.28,107 v67.01,108.27 | v59.01,83.25 60.03,82.23 J1.A1
  Bottom 0.813: 70.19,98.74 E$9.1 | v67.01,108.27 63.83,111.44 59.39,111.44 58.12,110.17 58.12,99.38 56.85,98.11 56.85,86.04 60.66,82.23 J1.A1
S$34  (via drill 0.6)
  Top 0.813: E$6.1 67.64,96.2 67.64,100.01 E$10.1 66.64,101.69 66.51,103.96 v66.51,105.73 | v59.77,86.04 J1.A0
  Bottom 0.813: E$10.1 67.64,100.01 67.64,96.2 E$6.1 | v66.51,105.73 63.2,110.17 60.66,110.17 59.39,108.9 59.39,98.74 58.12,97.47 58.12,87.95 v59.77,86.04 J1.A0
S$35  (via drill 0.6)
  other vias: 71.45,91.76
S$36  (via drill 1 pad 1.68)
  Top 0.813: J1.A2 65.11,80.84 | 65.11,80.96 v67.64,80.96
  Bottom 0.813: J1.A2 65.11,80.96 v67.64,80.96
S$37  (via drill 0.6)
  Top 0.813: 109.56,96.2 110.82,96.2 112.09,94.93 v112.09,70.8
  Bottom 0.813: 109.56,96.2 110.82,96.2 112.09,94.93 v112.09,70.8 108.92,67.63 94.95,67.63 93.68,68.9 93.68,69.53 95.58,71.44
S$38  (via drill 0.6)
  Top 0.813: 103.84,71.18 v105.75,72.07 | J1.D0 109.56,70.8 v108.92,70.17
  Bottom 0.813: 103.84,71.18 v105.75,72.07 J1.D0 109.56,70.8 v108.92,70.17
S$39  (via drill 0.6)
  Top 0.813: 109.56,98.74 110.82,98.74 114,95.57 v114,70.17 111.46,67.63 92.41,67.63 91.78,68.26 v91.78,72.07 95.46,75.25
  Bottom 0.813: 109.56,98.74 110.82,98.74 114,95.57 v114,70.17 | v91.78,72.07 95.46,75.25
S$40  (via drill 0.6)
  Top 0.813: v93.68,69.53 95.58,71.44
S$41  (via drill 0.6)
  Top 0.813: v101.94,77.15 103.2,74.61 | 108.92,74.61 108.28,75.25 v107.65,75.25
  Bottom 0.813: J1.D1 108.92,74.61 | 108.92,74.61 103.2,74.61 v101.94,77.15 | v107.65,75.25 108.28,75.25 108.92,74.61
S$42  (via drill 0.6)
  Top 0.813: v88.6,82.36 86.82,80.45
  Bottom 0.813: 86.82,80.45 v88.6,82.36
S$43  (via drill 0.6)
  Top 0.813: 99.39,71.44 v101.3,69.53 101.94,68.9 104.47,68.9 107.65,70.8 107.65,72.71 106.38,73.98 105.75,76.52 103.84,78.42 98.76,78.42 95.97,82.36
S$44  (via drill 0.6)
  Top 0.813: 89.87,80.33 v93.05,78.42 96.86,78.42 99.39,75.88
  Bottom 0.813: 99.39,75.88 96.86,78.42 v93.05,78.42 89.87,80.33
S$45
  Bottom 0.813: 99.39,70.8 100.67,69.53 101.17,69.53
S$46
  Top 0.813: 77.17,107.63 77.17,109.54 77.81,110.17
  Bottom 0.813: 77.81,110.17 77.17,109.54 77.17,107.63
S$47
  Top 0.813: 91.14,111.44 arc-180 92.41,111.44 91.14,111.44
S$48
  Top 0.61: 80.6,90.36 81.11,89.22
S$49
  Top 0.61: 83.65,89.22 84.16,88.71
S$50
  Top 0.61: 86.44,86.68 86.95,87.19
S$51
  Top 0.813: 56.47,122.37 56.47,121.09 | 56.47,119.82 56.47,121.09 | 56.47,121.09 55.2,121.09 | 56.47,121.09 57.74,121.09
S$52
  Top 0.813: 56.47,118.81 56.47,117.03
S$53
  Top 0.813: 57.74,117.03 arc-189 55.2,117.03
S$54
  Top 0.813: 56.47,115.51 56.47,114.24
S$55
  Top 0.813: 55.45,112.71 57.74,112.71
S$56
  Top 0.61: 99.01,99.89 102.06,99.89
S$57
  Top 0.61: 99.9,98.74 101.43,98.74
S$58
  Top 0.254: 100.67,98.87 100.67,97.73
  Top 0.406: 100.67,99.63 100.67,98.87
  Top 0.61: 100.41,97.73 100.67,97.73 100.92,97.73
S$59
  Top 0.61: 78.82,78.42 79.46,78.42
S$60
  Top 0.61: 77.55,81.22 76.92,81.85
S$61  (via drill 0.6)
  Top 0.813: v87.08,120.71 86.57,121.22 86.57,125.41
S$62  (via drill 0.6)
  Bottom 0.813: v97.49,120.59 97.49,120.97 97.49,121.73 98.12,122.37 98.12,124.78 98.12,125.16
  Bottom 1.422: 97.49,120.97 97.49,124.14 98.12,124.78
S$63  (via drill 0.6)
  Top 0.813: 81.61,125.29 81.61,121.73 82.38,120.97 v82.38,120.71
  Bottom 1.27: v82.38,120.71 82.38,119.82 85.3,116.9 96.22,116.9 100.54,112.59 100.54,100.14 99.27,98.87 98,98.87
S$64
  Bottom 0.813: 83.9,69.28 81.87,71.31 81.87,74.99 84.79,77.79 84.79,80.2
S$65  (via drill 0.6)
  Top 0.813: E$14.K v91.78,88.58
  Bottom 0.813: v91.78,88.58 E$14.K
S$66  (via drill 0.6)
  Top 0.61: v98.12,101.28 103.2,101.28
  Top 0.813: U$2.P13 v98.12,103.82 v98.12,101.28 U$2.P12 | U$2.P5 v85.42,101.28 85.42,102.55 | U$2.P4 v85.42,103.82 85.42,102.55 | 85.42,102.55 v77.81,102.55 79.71,100.65
  Top 1.27: v77.81,102.55 85.68,102.55
  Bottom 0.813: U$2.P13 v98.12,103.82 | v98.12,103.82 v98.12,101.28 v85.42,101.28 v85.42,103.82 v98.12,103.82 | v77.81,102.55 79.71,100.65
S$67
  Top 0.813: 98.12,87.31 E$15.1
S$68  (via drill 0.6)
  Top 0.813: U$2.P2 v85.42,108.9
  Bottom 0.813: v85.42,108.9 U$2.P2
S$69
  Top 0.813: E$15.2 108.16,86.81 J1.D6
  Bottom 0.813: J1.D6 108.03,86.81 E$15.2
S$70
  Top 0.813: J1.GND@1 63.83,94.93
  Bottom 0.813: J1.GND@1 63.83,94.93
S$71
  Top 0.61: 100.67,100.01 100.67,101.16
S$72  (via drill 0.6)
  Top 0.813: 83.9,69.15 v82.25,69.15
  Bottom 0.813: v82.25,69.15 83.9,69.15
S$73
  Top 0.61: 88.6,82.49 95.84,82.49 96.22,82.11
S$74
  Top 0.406: 88.6,82.23 91.78,82.23
  Top 0.61: 91.52,82.23 91.78,82.23 95.97,82.23 96.09,82.11
S$75  (via drill 0.6)
  other vias: 89.87,127.06
S$76  (via drill 0.6)
  Bottom 0.61: v101.55,127.06 100.67,127.06 99.27,128.46 97.11,128.46
S$77  (via drill 0.6)
  other vias: 64.98,80.84
S$78
  Top 0.61: 89.87,127.95 89.87,126.05
S$79
  Top 0.61: 101.55,126.18 101.55,127.7
S$80
  Bottom 0.61: 94.82,128.46 94.19,128.46 93.17,126.94
S$81
  Bottom 0.61: 83.52,128.59 83.27,128.59 81.74,127.06 81.74,126.18
S$82
  Bottom 0.61: 85.68,128.59 87.2,128.59 89.11,127.06 89.87,127.06
S$83
  Top 0.61: 89.49,129.86 88.98,129.86 87.08,127.95 87.08,126.68
S$84
  Top 0.61: 89.62,124.27 87.08,124.27
S$85
  Top 0.61: 101.05,124.27 98.51,124.27
S$86
  Top 0.61: 101.3,129.86 100.54,129.86 98.38,127.7 98.38,126.68
S$87
  Bottom 0.61: 64.34,101.41 64.34,101.92 65.23,102.81
S$88
  Bottom 0.813: 82.25,80.33 79.71,78.42
S$89
  Bottom 0.61: 83.52,107.12 85.3,108.9 85.55,108.65 83.77,106.87
S$90
  Top 1.27: 93.3,113.22 93.3,116.27 97.62,120.59
S$91
  Bottom 1.27: 104.22,112.46 104.22,112.71 98.12,118.81 89.11,118.81 87.2,120.71
S$92
  Top 1.27: 93.05,104.84 93.05,109.92
S$93  (via drill 0.6, 1 pad 1.68)
  Top 0.813: v67.64,78.42 64.47,78.42 J1.A3
  Bottom 0.813: v67.64,78.42 64.47,78.42 | J1.A3 v64.72,78.55
S$94
  Bottom 0.813: 98.12,87.31 100.67,89.85
S$95
  Bottom 0.813: 75.67,120.72 75.67,123.72
S$96
  Bottom 1.016: 75.27,113.98 74.63,113.35
  Bottom 1.27: 75.27,123.51 75.27,113.98
S$97  (via drill 0.6)
  Top 0.813: 65.67,117.72 65.67,120.72 v66.67,121.72 64.67,121.72 63.67,120.72
  Bottom 0.813: 63.67,120.72 64.67,121.72 v66.67,121.72 66.67,116.72
S$98
  Bottom 0.813: 58.67,113.72 58.67,119.72 61.31,121.72
S$99
  Top 0.813: 61.31,121.72 58.67,119.72
S$100
  Top 0.813: 58.75,119.7 59.39,119.7 59.39,103.19 60.03,102.55 J1.RESET@1
S$101  (via drill 0.6)
  other vias: 61.3,121.6
S$102  (via drill 3.2)
  other vias: 93.67,79.22
S$103  (via drill 3.2)
  other vias: 77.67,85.72
S$104  (via drill 3.2)
  other vias: 77.67,75.72
S$105
  Bottom 1.422: 84.16,117.16 82.89,118.43
S$106
  Bottom 1.422: 86.06,117.16 81.61,121.6 81.61,124.78
S$107
  Bottom 1.422: 86.69,120.97 86.69,124.78
S$108  (via drill 0.6)
  other vias: 65.11,86.68
S$109  (via drill 0.6)
  other vias: 76.03,96.08
S$110
  Bottom 1.422: 75.9,96.08 77.3,96.08
S$111
  Bottom 1.422: E$2.+ 79.71,96.71
S$112
  Top 1.422: 75.9,95.82 75.9,94.68 77.04,93.54
S$113
  Bottom 0.813: 70.17,76.72 70.67,76.22 77.67,76.22 81.67,80.22
S$114
  Bottom 1.016: 63.67,113.72 65.67,115.72
S$115
  Top 0.61: 76.67,109.22 76.67,113.22
S$116
  Top 0.61: 94.17,86.22 94.17,90.22
S$117
  Top 0.61: 97.67,90.22 arc-180 98.17,86.22 | 80.67,113.22 arc-180 80.67,109.22
S$118  (via drill 1)
  Bottom 1.016: 61.17,89.72 65.67,89.72
  Bottom 1.93: v66.17,89.72 65.67,89.72
S$119
  Top 0.305: 65.67,95.72 66.17,95.72 | 66.67,95.72 66.17,94.72 | 66.17,94.72 65.67,95.72 | 66.17,95.72 66.17,95.22 | 66.17,95.22 65.67,95.72 | 66.17,95.72 66.67,95.72 | 66.67,95.72 66.17,95.22 | 66.17,95.22 66.17,94.72 | 66.17,94.72 66.67,94.72 | 66.17,94.72 65.67,94.72
S$120  (via drill 0.6, 1)
  Top 1.016: v66.17,98.22 v66.17,99.72
  Bottom 0.305: 65.17,100.72 65.17,99.72 65.17,98.72
  Bottom 1.016: v66.17,99.72 v66.17,98.22 65.17,98.72 v66.17,99.72 | v66.17,99.72 65.17,100.72
  Bottom 1.93: 65.17,99.72 65.67,99.72
S$121  (via drill 0.6)
  Top 1.016: 66.17,90.72 v66.17,91.22 66.17,90.22
S$122
  Bottom 1.016: 65.17,101.22 68.67,104.22 | 68.67,104.22 69.17,104.72 | 68.67,104.22 76.67,104.22 | 76.67,104.22 78.67,106.22 75.17,104.72 | 76.67,104.22 78.17,104.72 78.67,105.72
S$123
  Bottom 1.016: 96.17,111.72 93.17,114.72 90.17,114.72 84.17,113.72
S$124
  Bottom 1.016: 89.17,113.72 93.67,113.72
S$125
  Top 1.016: 79.17,101.72 85.67,101.72
S$126
  Top 1.016: 85.17,103.72 81.17,102.22
S$127
  Top 1.016: 98.25,101.41 102.82,101.41 103.33,100.9 103.33,97.73 104.6,96.46 105.87,96.46 107.14,95.06
S$128  (via drill 0.6)
  other vias: 107.14,95.06
S$129
  Bottom 1.016: 107.14,95.06 106,96.33
S$130
  Top 1.016: 106.38,101.41 106.89,101.41 109.3,99
  Bottom 1.016: J1.D10 109.3,99 106.89,101.41 106.38,101.41
S$131
  Top 1.016: 109.3,96.46 109.17,96.46 106.76,98.87 106.38,98.87
  Bottom 1.016: 106.38,98.87 106.76,98.87 109.17,96.46 109.3,96.46
S$132  (via drill 0.6)
  Top 0.813: v102.32,111.82 100.67,113.47
  Bottom 0.813: v102.32,111.82 105.36,108.78
  Bottom 1.016: 105.36,108.78 105.36,104.08
S$133
  Bottom 1.27: 41.08,57.64 43.38,57.64 46.88,54.14 46.88,45.41 50.97,43.84
S$134
  Bottom 1.27: 34.98,57.84 34.98,57.55 39.88,52.65 39.88,50.15 40.08,49.95
S$135  (via drill 0.6)
  Bottom 1.27: 12.95,49.27 15.49,49.27 v16.77,48.01
S$136  (via drill 0.6)
  Bottom 1.27: 7.88,49.27 7.88,48.01 9.14,46.73 v9.14,44.2
S$137  (via drill 0.6)
  Bottom 1.27: 24.38,49.27 v24.38,44.2
S$138  (via drill 0.6)
  Bottom 1.27: 29.47,49.27 v29.47,44.2
S$139  (via drill 0.6)
  Top 0.813: 21.84,36.58 v19.3,36.58
  Bottom 0.813: 21.84,36.58 v19.3,36.58
S$140  (via drill 0.6)
  Top 0.813: 21.84,34.03 v19.3,34.03
  Bottom 0.813: 21.84,34.03 v19.3,34.03
S$141  (via drill 0.6)
  Top 0.813: v19.3,28.95 21.84,28.95
  Bottom 0.813: 21.84,28.95 v19.3,28.95
S$142  (via drill 0.6)
  Bottom 0.813: 21.84,23.88 v19.3,23.88
S$143
  Bottom 0.813: 21.84,21.34 19.3,21.34
S$144  (via drill 0.6)
  Top 0.813: v20.58,17.52 20.58,18.8
  Bottom 0.813: 21.84,18.8 v20.58,17.52
S$145  (via drill 0.6)
  Top 0.813: 29.47,18.8 v32.01,18.8
  Bottom 0.813: 29.47,18.8 v32.01,18.8
S$146  (via drill 0.6)
  Bottom 0.813: 29.47,21.34 28.2,21.34 v26.92,20.07
S$147
  Bottom 0.813: 29.47,23.88 30.73,25.15
S$148
  Bottom 0.813: 29.47,31.49 30.73,31.49 32.01,30.23
S$149  (via drill 0.6)
  Top 0.813: 30.73,34.03 v32.01,32.77
  Bottom 0.813: 30.73,34.03 v32.01,32.77
S$150  (via drill 0.6)
  Top 0.813: 30.73,36.58 v32.01,36.58 | v32.01,36.58 36.45,36.58 43.44,43.56 43.44,49.27 | 29.47,36.58 v32.01,36.58
  Bottom 0.813: 30.73,36.58 v32.01,36.58
S$151
  Top 0.813: 51.06,43.56 47.25,46.1
S$152  (via drill 0.6)
  other vias: 47.25,45.47
S$153  (via drill 0.6)
  Bottom 0.813: v43.44,45.47 43.44,49.27
S$154
  Top 0.813: S4.3 75.72,42.07
S$155  (via drill 0.6)
  Top 1.93: 62.01,29.88 65.06,29.88 66.2,29.75 v66.2,47.28 66.2,50.2 E$26.P$1
  Bottom 1.93: E$26.P$1 66.2,50.2 v66.2,47.28 66.2,47.15
S$156
  Bottom 1.93: 74.71,53.75 74.71,52.1 75.85,50.96 75.85,42.45
S$157  (via drill 0.6)
  other vias: 72.93,39.53
S$158  (via drill 0.6)
  Top 1.93: 73.06,42.83 73.06,29.88 67.98,24.8 67.09,24.8 | 62.01,24.8 67.09,24.8 | 67.09,24.8 76.11,15.78 v79.53,15.78 82.46,15.78
  Bottom 1.016: v79.53,15.78 82.08,15.78
S$159  (via drill 0.6)
  Bottom 1.93: 83.34,45.63 v83.34,40.55
S$160  (via drill 0.6)
  Bottom 1.93: 88.42,46.9 v88.42,40.55
S$161  (via drill 0.6)
  Bottom 1.93: 94.78,46.9 v94.78,40.55
S$162  (via drill 0.6)
  Bottom 1.93: 99.86,46.9 v99.86,40.55
S$163  (via drill 0.6)
  Top 1.016: 61.75,32.29 63.66,32.29 v64.3,32.93
S$164
  Bottom 1.016: 73.19,39.91 73.19,43.09
S$165  (via drill 0.6)
  Bottom 1.016: 90.33,28.48 v92.23,28.48
S$166  (via drill 0.6)
  Bottom 1.016: 89.69,20.86 v92.87,20.86
S$167  (via drill 0.6)
  Bottom 1.016: 89.69,18.32 v92.87,18.32
S$168  (via drill 0.6)
  Bottom 1.016: 89.69,15.78 v92.87,15.78
S$169  (via drill 0.6)
  Bottom 1.016: v78.9,20.86 82.08,20.86
S$170  (via drill 0.6)
  Bottom 1.016: v79.53,28.48 82.08,28.48
S$171  (via drill 0.6)
  Top 1.016: 89.69,25.31 v92.23,25.31
  Bottom 1.016: 89.69,25.31 v92.23,25.31
S$172  (via drill 0.6)
  Top 1.016: v107.47,39.28 110.01,39.28
S$173  (via drill 0.6)
  Top 1.016: v107.47,29.12 110.01,29.12
S$174  (via drill 0.6)
  Top 1.016: v106.2,24.04 107.47,24.04 108.11,24.67 110.01,24.67
S$175  (via drill 0.6)
  Top 1.016: v107.47,21.5 108.11,22.13 110.01,22.13
S$176
  Bottom 0.813: 175.74,114.31 S5.2
S$177
  Bottom 1.27: 171.88,79.97 176.96,85.05 176.96,111.72
S$178  (via drill 0.6)
  Top 1.27: 170.61,97.75 169.34,97.75 v168.07,96.48
  Bottom 1.27: 171.88,74.89 169.34,74.89 168.07,76.16 v168.07,96.48 169.34,97.75 170.61,97.75
S$179
  Top 1.27: 122.35,104.1 124.89,104.1
S$180  (via drill 0.6)
  Top 1.27: 122.35,90.13 v124.89,90.13
S$181  (via drill 0.6)
  Top 1.27: 122.35,87.59 v124.89,87.59
S$182  (via drill 0.6)
  Top 1.27: 122.35,85.05 v124.89,85.05
S$183  (via drill 0.6)
  other vias: 167.82,122.64
S$184  (via drill 0.6)
  Bottom 1.016: v171.25,121.88 174.42,125.06 175.06,125.06
S$185  (via drill 0.6)
  other vias: 125.53,129.5
S$186  (via drill 0.6)
  other vias: 125.53,124.42
S$187
  Bottom 1.27: 118.54,124.42 124.89,124.42
S$188
  Bottom 1.27: 124.89,129.5 118.54,129.5
S$189
  Bottom 1.016: 168.07,122.51 175.69,130.13
S$190
  Bottom 0.813: 172.9,104.99 172.9,113.12 174.42,114.64
S$191
  Bottom 1.27: 132.57,40.92 131.78,40.92 U$5.P14
S$192  (via drill 0.6)
  other vias: 133.03,40.16
S$193  (via drill 0.6)
  Top 0.813: v130.5,55.41 130.5,54.14
S$194
  Bottom 0.813: 130.03,54.89 130.51,54.89 U$5.P9
S$195
  Bottom 1.27: 166.86,46 167.08,45.78 S6.2
S$196  (via drill 0.6)
  other vias: 167.32,45.24
S$197
  Bottom 0.813: 139.56,44.09 U$5.P4 arc152 U$5.P5
S$198  (via drill 0.6)
  Top 0.813: v141.29,45.24 140.02,43.98
  Bottom 0.813: 140.02,43.98 v141.29,45.24
(copper drawn outside any net)
  shapes: Bottom area x3, Top area x4, Top circle x1

## Text on the board
Top: Kyesh | Off | sr04 | On | 1 | 16 | 330 | 10k | sr04 | 8 | vcc | 330 | 5v | HC-06 | Brendan | Default | ISC Training Program w2016 | Russell | Russell | Hashim | JMEPLEY | Russell | Russell
Bottom: 680 | 680 | Kyesh | 8 | 9 | Cristian
tNames: power diode